# Altium PCB ILX_PCB.PcbDoc
Units mm, origin at the board's own origin, x right, y up, seen from the top; angles counter-clockwise.
Board outline 27.94 x 43.18 mm, 2 copper layers (Top Layer, Bottom Layer); 2 components, 8 nets, 70 pads, 0 vias.
Unrouted connection lines stored in the file: 4.
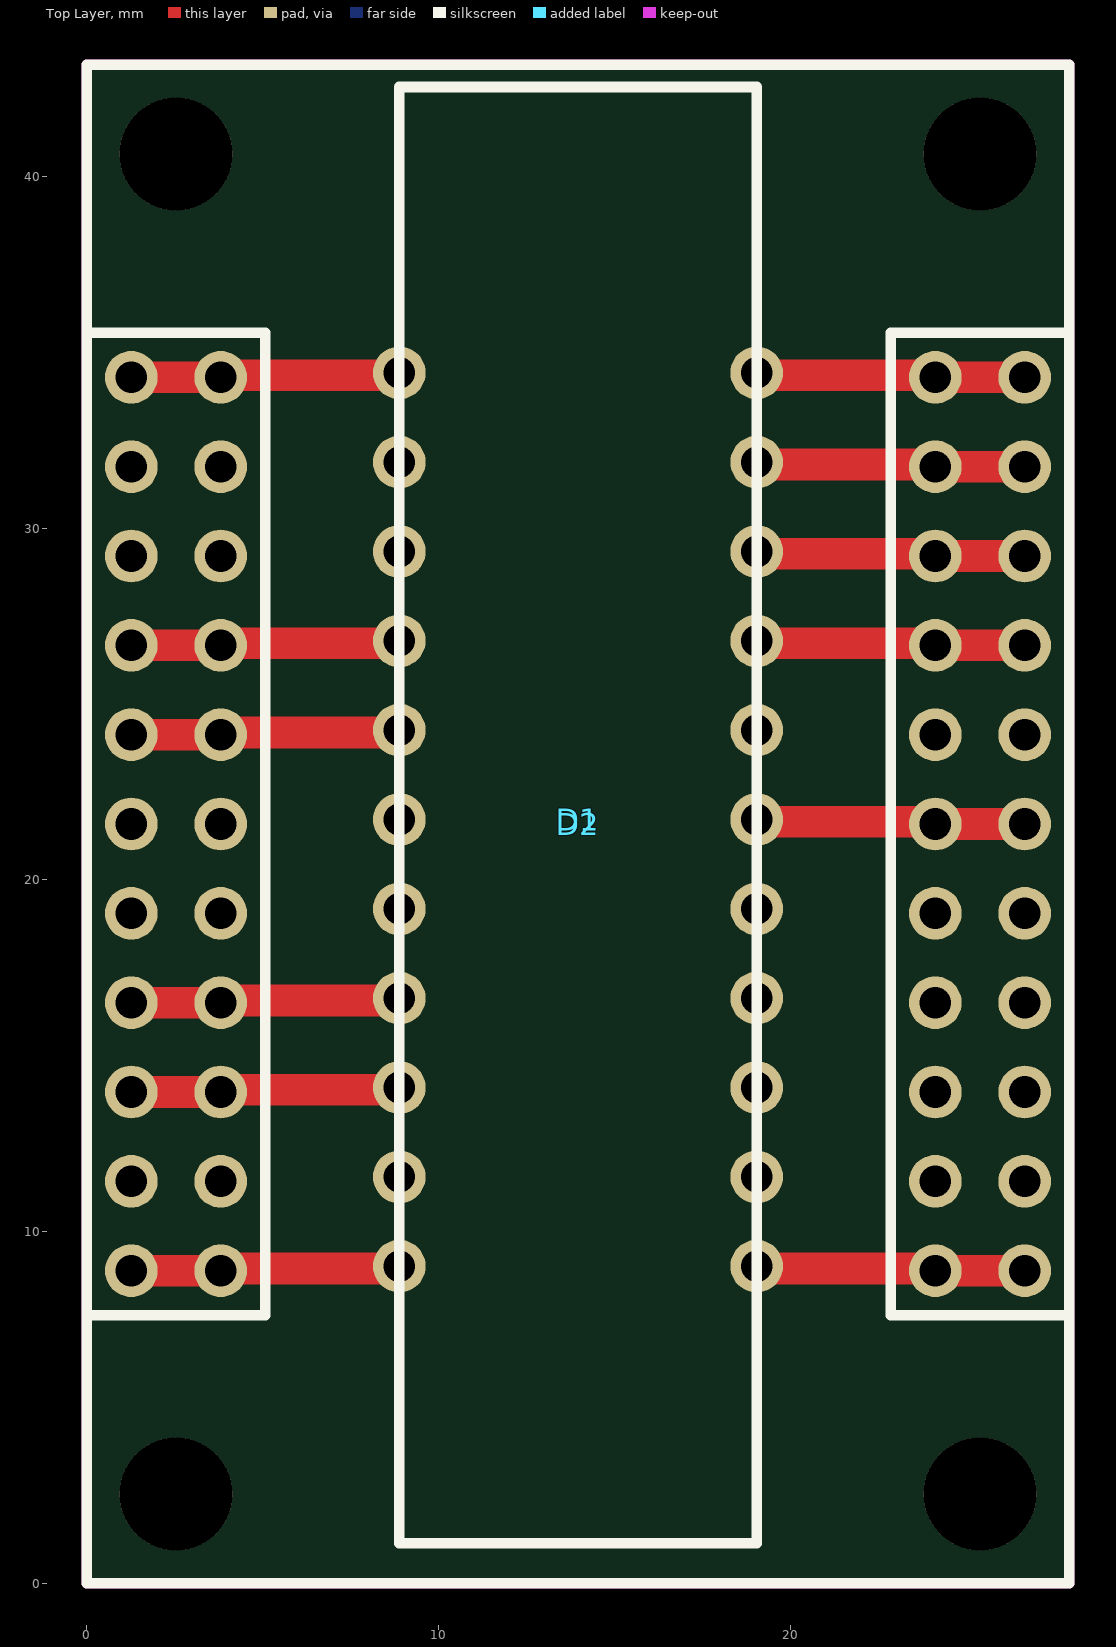
[diagram p0: Top Layer view]
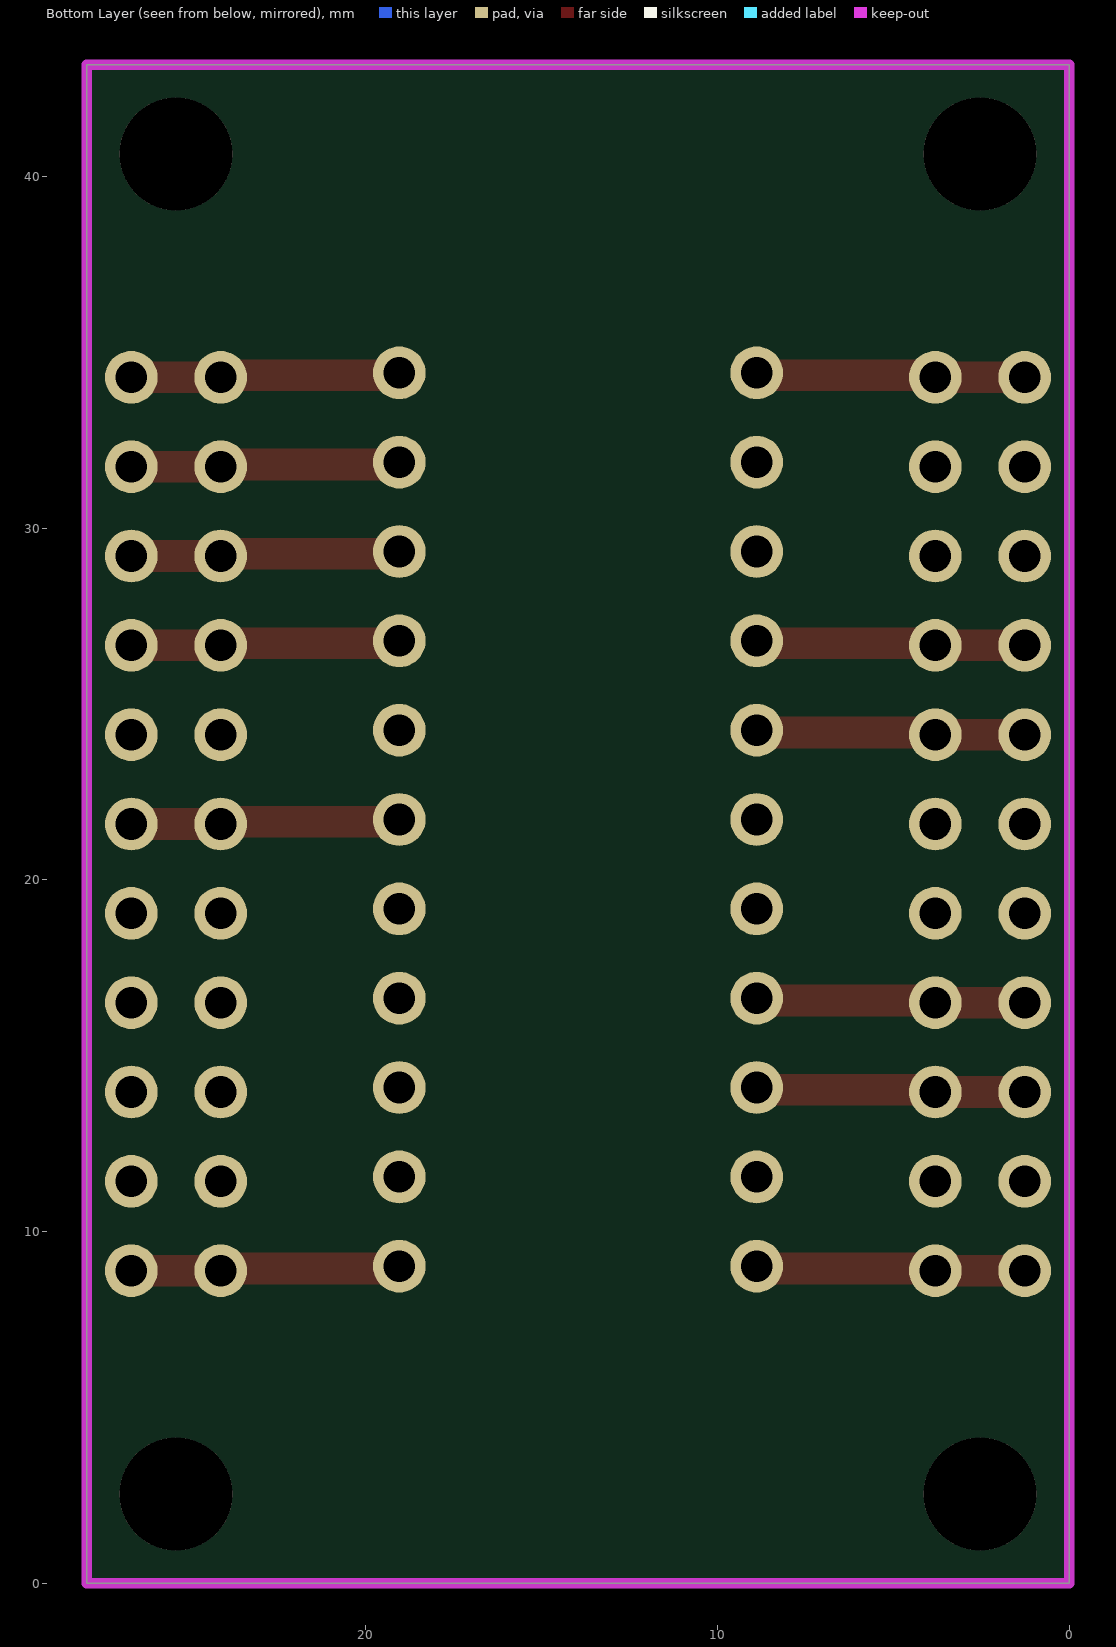
[diagram p1: Bottom Layer view, seen from below]

## Layer stack, top to bottom
Top Solder: solder mask 0.0102, Solder Resist, Dk 3.5
Top Layer: signal copper 0.0356
Dielectric 1: dielectric 0.32, FR-4, Dk 4.8
Bottom Layer: signal copper 0.0356
Bottom Solder: solder mask 0.0102, Solder Resist, Dk 3.5

## Board outline
0,0 27.94,0 27.94,43.18 0,43.18

## Design rules (kind name [scope] priority, off if disabled: settings)
Clearance [All] p1: gap=0.2 ignorepadtopadclearanceinfootprint=FALSE
HoleSize [All] p1: absolutevalues=TRUE maxlimit=2.54 minlimit=0.4 maxpercent=80.000 minpercent=20.000
MinimumAnnularRing [All] p1: minimumring=0.2
PolygonConnect [All] p1: connectstyle=Relief reliefconductorwidth=0.254 reliefentries=4 polygonreliefangle="90 Angle" airgapwidth=0.254
RoutingVias [All] p1: holewidth=0.711 width=1.27 viastyle="Through Hole" minholewidth=0.711 minwidth=1.27 maxholewidth=0.711 maxwidth=1.27
SolderMaskExpansion [All] p1: expansion=0.2
Width [All] p1: maxlimit=5 minlimit=0.3 preferedwidth=0.3
29 further rules are at their usual default settings.

## Classes and differential pairs
component class ILX_Sheet: D1

## Components (designator, comment, footprint, x,y, rotation, side; value= is the part's Value field where it differs from the comment)
D1 "ILX751A" ILX751A 8.89,34.417 r0 top
D2 "ILX751A" "ILX751A - Module" 1.27,34.29 r0 top

## Footprints (in the part's own frame and the unit in brackets; to place one, negate y for a bottom-side part, rotate by r counter-clockwise, add the part's x,y. Pads: shape width x height; smd on the part's side, far side on the other; paste and mask are expansions set on the pad)
ILX751A [mm]
  round 1.5 hole 0.9: 1(0,0) 2(0,-2.54) 3(0,-5.08) 4(0,-7.62) 5(0,-10.16) 6(0,-12.7) 7(0,-15.24) 8(0,-17.78) 9(0,-20.32) 10(0,-22.86) 11(0,-25.4) 12(10.16,-25.4) 13(10.16,-22.86) 14(10.16,-20.32) 15(10.16,-17.78) 16(10.16,-15.24) 17(10.16,-12.7) 18(10.16,-10.16) 19(10.16,-7.62) 20(10.16,-5.08) 21(10.16,-2.54) 22(10.16,0)
  silkscreen extent 0,-33.27 10.16,8.13, body extent 0,-33.27 10.16,8.13, height 4.85
"ILX751A - Module" [mm]
  round 1.5 hole 0.9: 1(0,0) 1(2.54,0) 2(0,-2.54) 2(2.54,-2.54) 3(0,-5.08) 3(2.54,-5.08) 4(0,-7.62) 4(2.54,-7.62) 5(0,-10.16) 5(2.54,-10.16) 6(0,-12.7) 6(2.54,-12.7) 7(0,-15.24) 7(2.54,-15.24) 8(0,-17.78) 8(2.54,-17.78) 9(0,-20.32) 9(2.54,-20.32) 10(0,-22.86) 10(2.54,-22.86) 11(0,-25.4) 11(2.54,-25.4) 12(22.86,-25.4) 12(25.4,-25.4) 13(22.86,-22.86) 13(25.4,-22.86) 14(22.86,-20.32) 14(25.4,-20.32) 15(22.86,-17.78) 15(25.4,-17.78) 16(22.86,-15.24) 16(25.4,-15.24) 17(22.86,-12.7) 17(25.4,-12.7) 18(22.86,-10.16) 18(25.4,-10.16) 19(22.86,-7.62) 19(25.4,-7.62) 20(22.86,-5.08) 20(25.4,-5.08) 21(22.86,-2.54) 21(25.4,-2.54) 22(22.86,0) 22(25.4,0)
  silkscreen extent -1.27,-34.29 26.67,8.89

## Part data
D2: library part ILX751A_module

## Free pads (board coordinates)
  round 3.2 hole 3.2: ""(2.54,2.54) ""(2.54,40.64) ""(25.4,2.54) ""(25.4,40.64)

## Nets (pads, with @x,y where several pads share a name; then routed paths per layer and width w, separated by ;. In a path a pad name is that pad's centre, name@x,y a point inside that pad or via, vN(x,y) a via of type N, cw(c..) or ccw(c..) an arc to the next point about the centre after c; other vN are vias at no path point)
CLK: D1.5 D2.5 | length 7.7
  Top Layer w0.9: D2.5@1.27,24.13 3.81,24.13 3.873,24.194 8.826,24.194 D1.5
GND: D1.12 D1.17 D1.19 D2.12 D2.17 D2.19 | length 23
  Top Layer w0.9: D1.12 19.113,8.954 24.066,8.954 24.13,8.89 D2.12@26.67,8.89 ; D1.17 19.113,21.653 24.066,21.653 24.13,21.59 D2.17@26.67,21.59 ; D1.19 19.113,26.733 24.066,26.733 24.13,26.67 D2.19@26.67,26.67
ROG: D1.11 D2.11 | length 7.7
  Top Layer w0.9: D2.11@1.27,8.89 3.81,8.89 3.873,8.954 8.826,8.954 D1.11
SHSW: D1.4 D2.4 | length 7.7
  Top Layer w0.9: D2.4@1.27,26.67 3.81,26.67 3.873,26.733 8.826,26.733 D1.4
SHUT: D1.9 D2.9 | length 7.7
  Top Layer w0.9: D2.9@1.27,13.97 3.81,13.97 3.873,14.034 8.826,14.034 D1.9
VDD1: D1.20 D2.20 | length 7.7
  Top Layer w0.9: D1.20 19.113,29.273 24.066,29.273 24.13,29.21 D2.20@26.67,29.21
VDD2: D1.8 D1.21 D1.22 D2.8 D2.21 D2.22 | length 22.9
  Top Layer w0.9: D2.8@1.27,16.51 D2.8@3.81,16.51 ; D2.8@3.937,16.637 4,16.573 8.826,16.573 D1.8 ; D1.21 19.113,31.813 24.066,31.813 24.13,31.75 D2.21@26.67,31.75 ; D1.22 19.113,34.353 24.066,34.353 24.13,34.29 D2.22@26.67,34.29
VOUT: D1.1 D2.1 | length 7.7
  Top Layer w0.9: D2.1@1.27,34.29 3.81,34.29 3.873,34.353 8.826,34.353 D1.1
pads on no net: D1.2 D1.3 D1.6 D1.7 D1.10 D1.13 D1.14 D1.15 D1.16 D1.18 D2.2 D2.3 D2.6 D2.7 D2.10 D2.13 D2.14 D2.15 D2.16 D2.18

## Keep-outs
Keep-Out Layer:
  the board outline again, w0.3

## Silkscreen, mask and mechanical layers (free items; w line width, h text height)
Top Overlay:
  lines w0.3: 0,7.62 5.08,7.62 5.08,35.56 0,35.56 0,7.62 ; 22.86,7.62 27.94,7.62 27.94,35.56 22.86,35.56 22.86,7.62